# Altium PCB PowerBoardv2.PcbDoc (part 1 of 2)
Units mil, origin at the board's own origin, x right, y up, seen from the top; angles counter-clockwise.
Board outline 3917.32 x 2917.32 mil, 2 copper layers (Top Layer, Bottom Layer), stack 64.512 mil thick; 84 components, 73 nets, 331 pads, 371 vias.
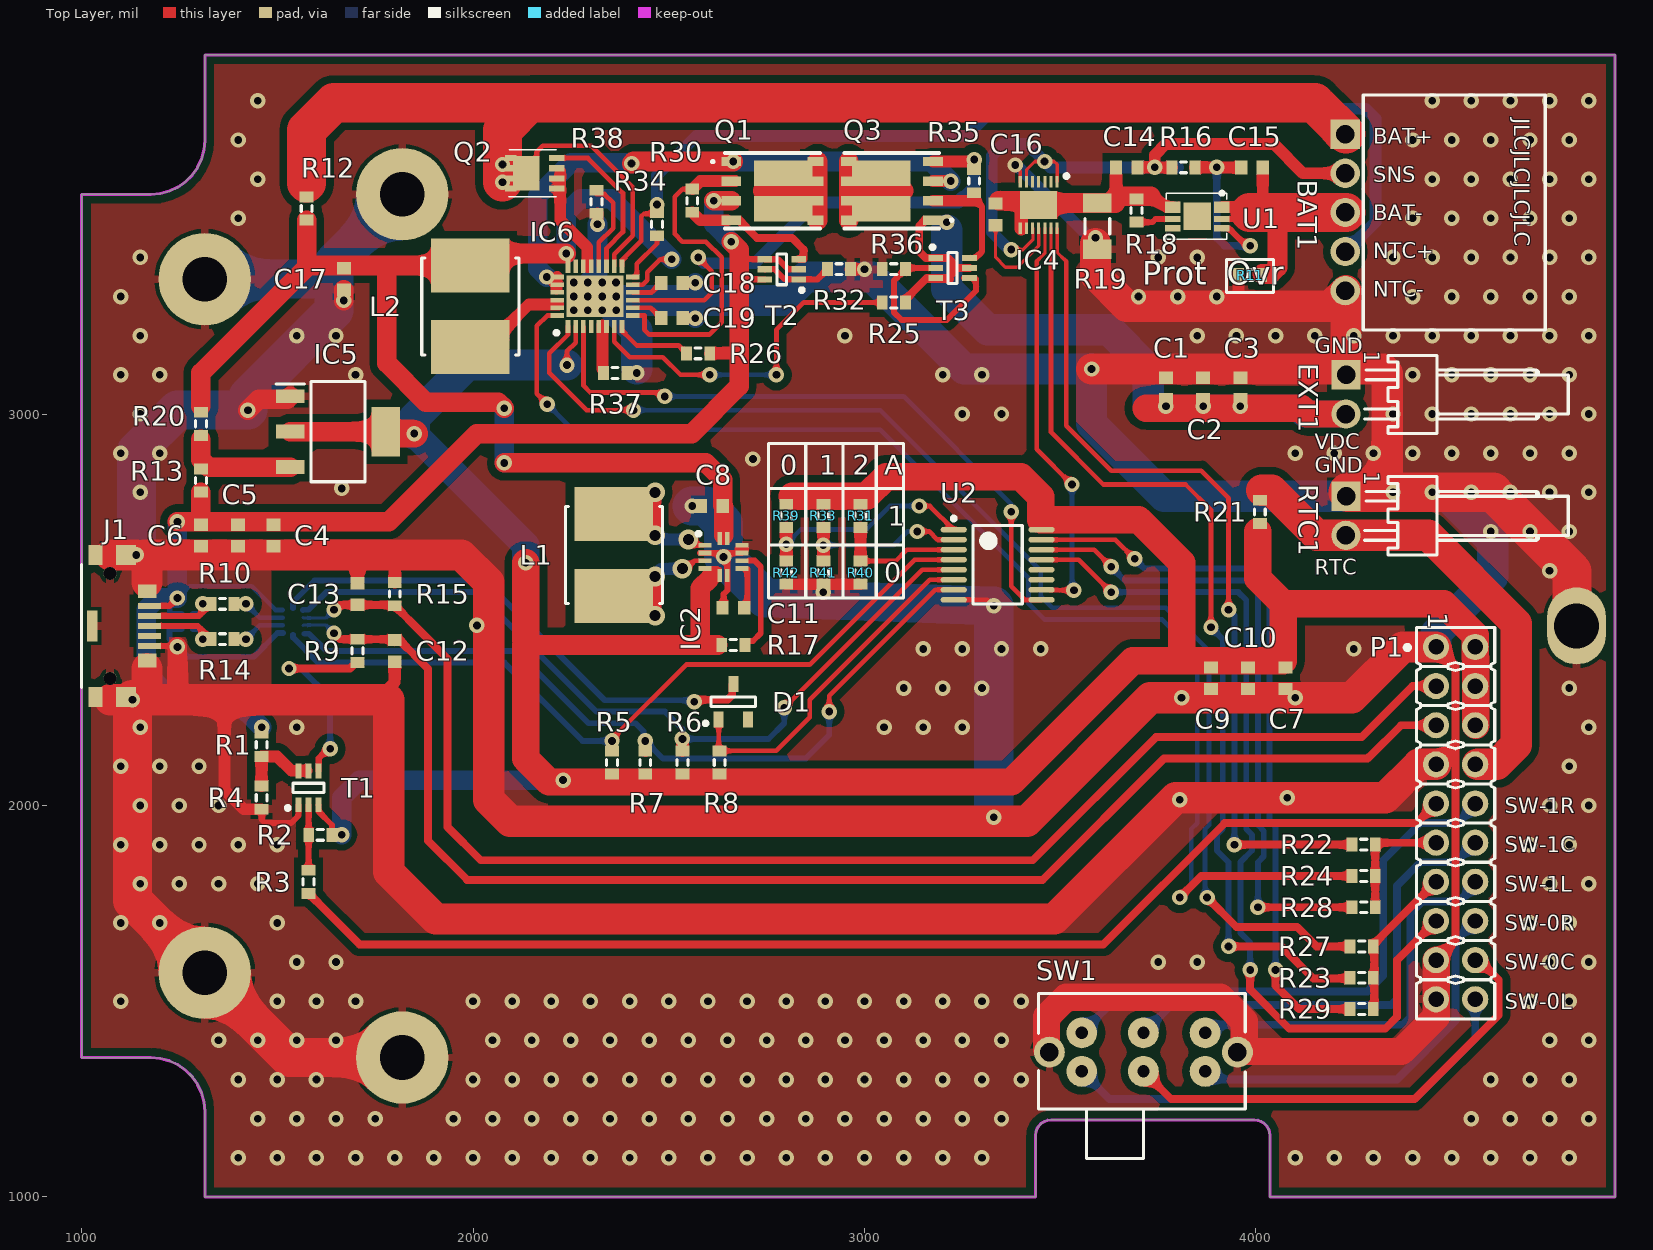
[diagram p0: Top Layer view]
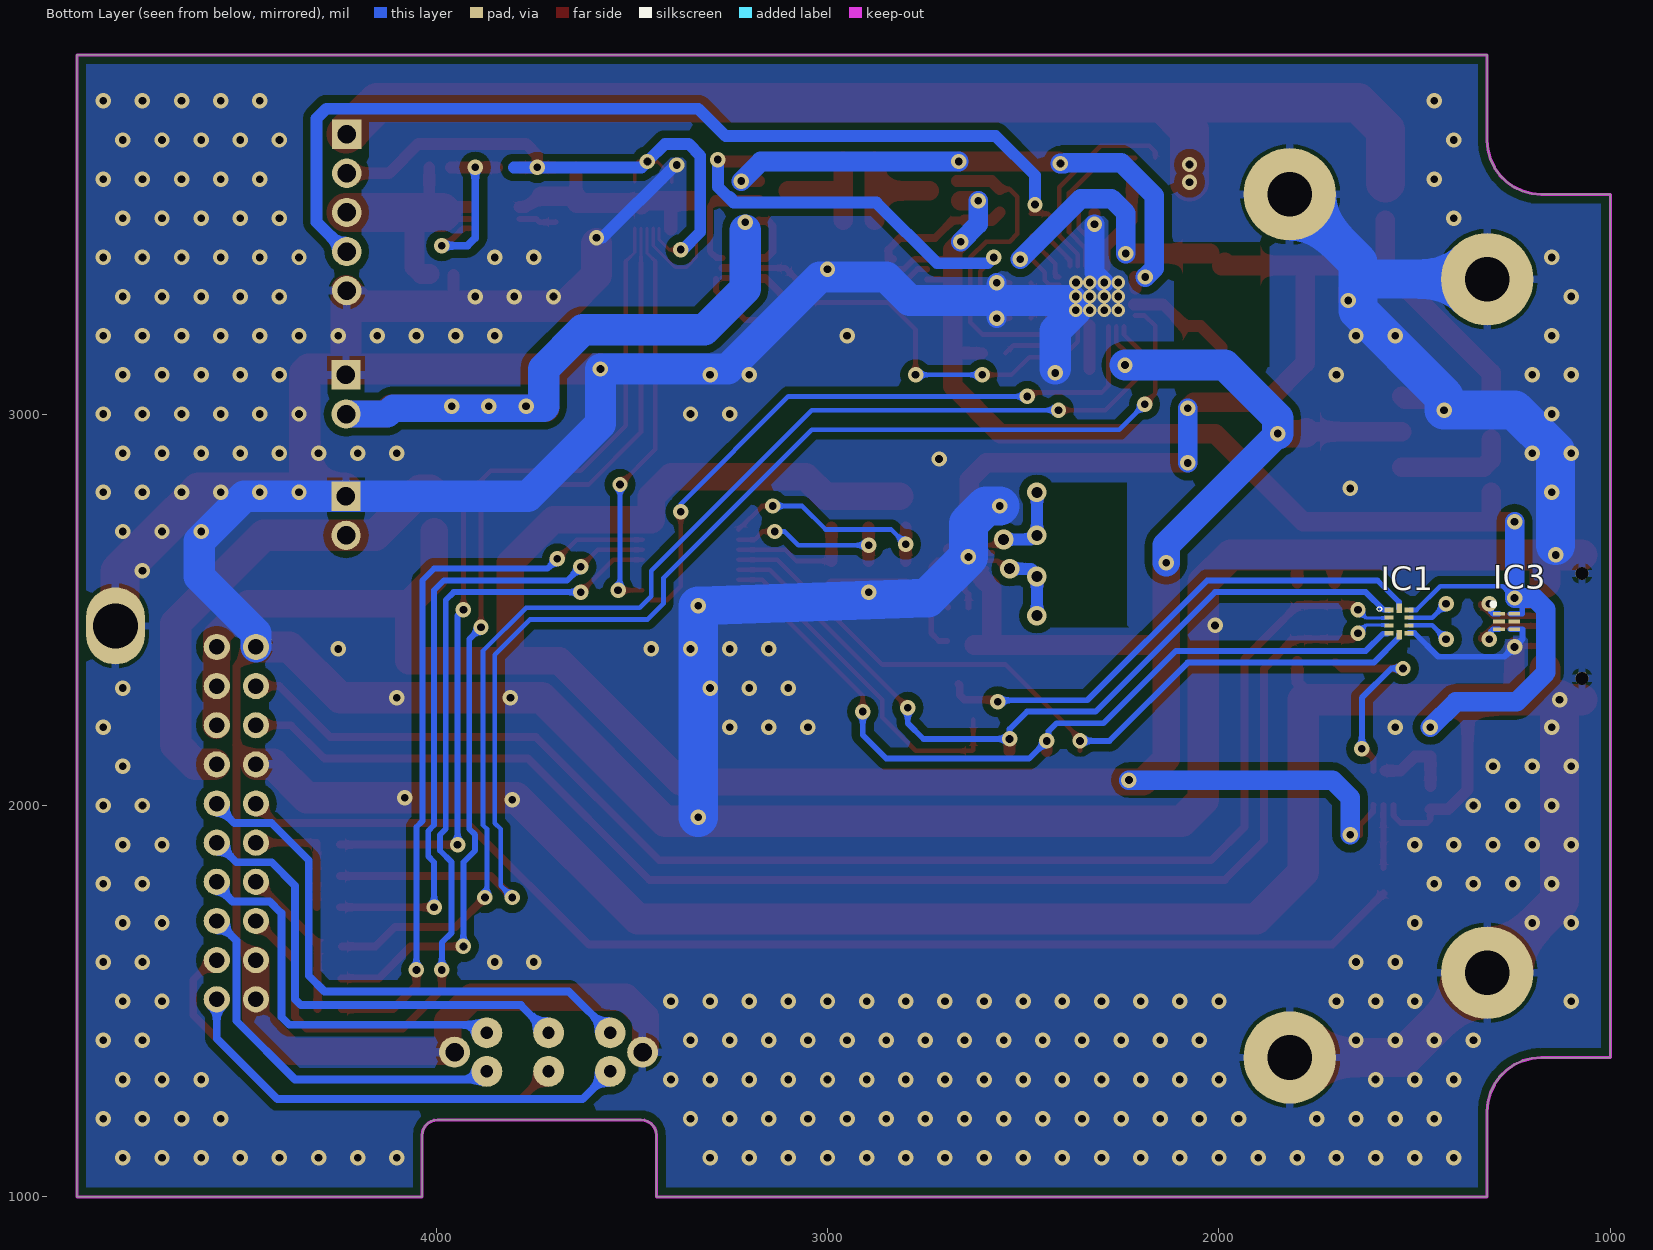
[diagram p1: Bottom Layer view, seen from below]

## Layer stack, top to bottom
Top Solder: solder mask 1, SM-001, Dk 4
Top Layer: signal copper 2.7559
Dielectric 1: core 59, Core-043, Dk 4.3
Bottom Layer: signal copper 2.7559
Bottom Solder: solder mask 1, SM-001, Dk 4

## Board outline
3437.01,1000 3437.01,1157.48 3437.99,1166.24 3440.91,1174.56 3445.6,1182.03 3451.83,1188.26 3459.3,1192.95 3467.62,1195.86 3476.38,1196.85 3996.06,1196.85 4004.82,1195.86 4013.14,1192.95 4020.61,1188.26 4026.84,1182.03 4031.53,1174.56 4034.45,1166.24 4035.43,1157.48 4035.43,1000 4917.32,1000 4917.32,3917.32 1314.96,3917.32 1314.96,3698.82 1312.87,3674.89 1306.65,3651.69 1296.5,3629.92 1282.72,3610.25 1265.74,3593.26 1246.06,3579.48 1224.29,3569.33 1201.09,3563.12 1177.16,3561.02 1000,3561.02 1000,1356.3 1177.16,1356.3 1201.09,1354.21 1224.29,1347.99 1246.06,1337.84 1265.74,1324.06 1282.72,1307.08 1296.5,1287.4 1306.65,1265.63 1312.87,1242.43 1314.96,1218.5 1314.96,1000

## Design rules (kind name [scope] priority, off if disabled: settings)
BoardOutlineClearance [All] p1: gap=7.87 ignorepadtopadclearanceinfootprint=FALSE except(15.75: Arc-SplitBarrior Arc-SplitContinuation Track-SplitBarrior Track-SplitContinuation SMDPad-SplitBarrior SMDPad-SplitContinuation THPad-SplitBarrior THPad-SplitContinuation Via-SplitBarrior Via-SplitContinuation Fill-SplitBarrior Fill-SplitContinuation Poly-SplitBarrior Poly-SplitContinuation Region-SplitBarrior Region-SplitContinuation Text-SplitBarrior Text-SplitContinuation)
Clearance "GND Flood" [InNamedPolygon('GND_FLOOD_TOP') or InNamedPolygon('GND_FLOOD_BOTTOM')] p1: gap=20 ignorepadtopadclearanceinfootprint=FALSE
Clearance "Clearance Bottom Layer" [OnLayer('Bottom Layer')] p2: gap=6 ignorepadtopadclearanceinfootprint=TRUE except(10: Arc-Text Track-Text SMDPad-Text THPad-Text Via-Text Fill-Text Poly-Text Region-Text Text-Text)
Clearance "Clearance Top Layer" [OnLayer('Top Layer')] p3: gap=6 ignorepadtopadclearanceinfootprint=TRUE except(10: Arc-Text Track-Text SMDPad-Text THPad-Text Via-Text Fill-Text Poly-Text Region-Text Text-Text)
Clearance [All] p4: gap=7.87 ignorepadtopadclearanceinfootprint=FALSE except(3.5: Arc-Arc Arc-Track Arc-SMDPad Track-Track Track-SMDPad SMDPad-SMDPad; 5: Arc-Via Track-Via SMDPad-Via THPad-Via Via-Via; 10: Arc-Text Track-Text SMDPad-Text THPad-Text Via-Text Fill-Text Poly-Text Region-Text Text-Text)
DiffPairsRouting [All] p1: maxlimit=100 minlimit=10 mostfreqgap=30 toplayer_minwidth=8 toplayer_maxwidth=100 toplayer_prefwidth=15 bottomlayer_minwidth=8 bottomlayer_maxwidth=100 bottomlayer_prefwidth=15 maxuncoupledlength=500
HoleSize [All] p1: absolutevalues=TRUE maxlimit=248.03 minlimit=7.87 maxpercent=80.000 minpercent=20.000
MinimumAnnularRing [All] p1: minimumring=3
MinimumSolderMaskSliver [All] p1: minsoldermaskwidth=3.94
PolygonConnect PolygonConnect_1 [All] p1: thpad.connectstyle=Relief thpad.reliefconductorwidth=20 thpad.reliefentries=4 thpad.polygonreliefangle="90 Angle" thpad.airgapwidth=10 smdpad.connectstyle=Relief smdpad.reliefconductorwidth=20 smdpad.reliefentries=4 smdpad.polygonreliefangle="90 Angle" smdpad.airgapwidth=10 via.connectstyle=Direct via.reliefconductorwidth=20 via.reliefentries=4 via.polygonreliefangle="90 Angle" via.airgapwidth=10
RoomDefinition "[004] Charger" [InComponentClass('[004] Charger')] p1: confinementstyle=ConfineIn formatcopy=TRUE lockcomponents=FALSE outline 1636.38,3285.79 1636.38,3404.21 1838.32,3404.21 1838.32,3464.13 2030.4,3464.13 2030.4,3726.38 2285.05,3726.38 2285.05,3681.38 3239.29,3681.38 3239.29,3654.21 3313.62,3654.21 3313.62,2384.21 4108.62,2384.21 4108.62,2265.79 3851.38,2265.79 3851.38,2376.38 2605.79,2376.38 2605.79,2450.87 2205.32,2450.87 2205.32,3085.87 1838.32,3085.87 1838.32,3285.79
RoomDefinition "[003] Connectors" [InComponentClass('[003] Connectors')] p2: confinementstyle=ConfineIn formatcopy=TRUE lockcomponents=FALSE outline 2766.38,2535.79 2766.38,2799.21 4176.6,2799.21 4176.6,3829 4753,3829 4753,3202 4811.65,3202 4811.65,2582 4623.94,2582 4623.94,1441.06 4006.13,1441.06 4006.13,1084.42 3419.07,1084.42 3419.07,2493.78 3173.5,2493.78 3173.5,2535.79
RoomDefinition "[002] Battery" [InComponentClass('[002] Battery')] p3: confinementstyle=ConfineIn formatcopy=TRUE lockcomponents=FALSE outline 3301.38,3450.79 3301.38,3569.21 3363.15,3569.21 3363.15,3628.7 3610.79,3628.7 3610.79,3663.62 3874.21,3663.62 4049.21,3663.62 4049.21,3596.38 3944.65,3596.38 3944.65,3416.26 3653.23,3416.26 3653.23,3374.53 3536.77,3374.53 3536.77,3439.41 3363.15,3439.41 3363.15,3450.79
RoomDefinition "[001] USB" [InComponentClass('[001] USB')] p4: confinementstyle=ConfineIn formatcopy=TRUE lockcomponents=FALSE outline 905.36,2237.97 905.36,2679.35 1216.76,2679.35 1216.76,2599.21 1738.62,2599.21 1833.62,2599.21 1833.62,2352.76 2744.88,2352.76 2744.88,2177.24 2663.62,2177.24 2663.62,2050.79 1669.21,2050.79 1669.21,1891.38 1613.62,1891.38 1613.62,1745.79 1546.38,1745.79 1546.38,1960.79 1426.38,1960.79 1426.38,2237.97
RoomDefinition "[000] Block Diagram" [InComponentClass('[000] Block Diagram')] p5: confinementstyle=ConfineIn formatcopy=TRUE lockcomponents=FALSE outline 1271.38,2630.79 1271.38,2889.21 1271.38,3034.21 1475.71,3034.21 1475.71,3107.72 1541.38,3107.72 1541.38,3584.21 1608.62,3584.21 1608.62,3388.62 4044.21,3388.62 4044.21,3321.38 4043.62,3321.38 4043.62,2690.79 1523.62,2690.79 1523.62,2630.79
RoutingCorners [All] p1: cornerstyle=Round minsetback=100 maxsetback=100
RoutingVias [All] p1: holewidth=19.68 width=39.37 viastyle="Through Hole" minholewidth=7.87 minwidth=17.72 maxholewidth=39.37 maxwidth=78.74
SilkToSilkClearance [All] p1: silktosilkclearance=3.94
SilkToSolderMaskClearance [IsPad] p1: minsilkscreentomaskgap=3.94 clearancetoexposedcopper=TRUE
SolderMaskExpansion [All] p1: expansion=4
UnRoutedNet [All] p1: checkbadconnections=TRUE
Width [All] p1: maxlimit=100 minlimit=3.5 preferedwidth=15
23 further rules are at their usual default settings.

## Classes and differential pairs
component class "[004] Charger": C4 C8 C9 C15 C18 C19 IC2 IC6 L2 Q2 Q3 R12 R13 R16 R19 R25 R26 R30 R36 R37 R40 T2 T3
component class "[003] Connectors": BAT1 EXT1 P1 R12 R23 R25 R27 R37 R40 R41 R42 RTC1 SW1 U2
component class "[002] Battery": C4 C6 C11 IC4 R16 R25 R26 U2
component class "[001] USB": C2 C6 D1 IC1 IC6 J1 R3 R5 R9 R10 R11 R15 R36 T1
component class "[000] Block Diagram": C1 C2 C6 C16 IC1 R9 R15 R35 R36
differential pair USB_R: +USB_R_P -USB_R_N
differential pair USB_DEV: +USB_DEV_P -USB_DEV_N

## Components (designator, comment, footprint, x,y, rotation, side; value= is the part's Value field where it differs from the comment)
BAT1 "Header 5H" MOLEX-705530004 4514,3515 r270 top
C1 "Cap Semi" 1608[0603] 3770,3065 r270 top value=10uF
C2 "Cap Semi" 1608[0603] 3865,3065 r270 top value=1uF
C3 "Cap Semi" 1608[0603] 3960,3065 r270 top value=100nF
C4 "Cap Semi" 1608[0603] 1490,2690 r90 top value=10uF
C5 "Cap Semi" 1608[0603] 1400,2690 r90 top value=1uF
C6 "Cap Semi" 1608[0603] 1305,2690 r90 top value=100nF
C7 "Cap Semi" 1608[0603] 4075,2325 r90 top value=10uF
C8 "Cap Semi" 1608[0603] 2610,2765 r0 top value=10uF
C9 "Cap Semi" 1608[0603] 3885,2325 r90 top value=10uF
C10 "Cap Semi" 1608[0603] 3980,2325 r90 top value=10uF
C11 "Cap Semi" 1608[0603] 2665,2505 r0 top value=1nF
C12 "Cap Semi" 1608[0603] 1800,2395 r270 top value=47pF
C13 "Cap Semi" 1608[0603] 1705,2540 r90 top value=47pF
C14 "Cap Semi" 1608[0603] 3670,3630 r0 top value=100nF
C15 "Cap Semi" 1608[0603] 3990,3630 r180 top value=100nF
C16 "Cap Semi" 1608[0603] 3335,3510 r270 top value=470nF
C17 "Cap Semi" 1608[0603] 1670,3345 r90 top value=22uF
C18 "Cap Semi" 1608[0603] 2508,3335 r180 top value=47nF
C19 "Cap Semi" 1608[0603] 2508,3245 r180 top value=100nF
D1 "BAT54" SOT95P240X130-3N 2665,2265 r90 top
EXT1 "Header 2" MOLEX-705530001 4229.9,3050 r270 top
IC1 "BQ24392RSER" RSE(R-PUQFN-N10) 1540,2470 r270 bottom
IC2 "TPS63051RMWR" QFN50P250X250X100-12N-D 2640,2635 r0 top
IC3 "TPD4S012DRYR" SON50P100X145X60-6N 1265,2470 r180 bottom
IC4 "MAX17260SETD+" SON40P300X300X80-15N 3445,3534.06 r270 top
IC5 "AZ1117IH-3.3TRG1" SOT230P700X170-4N 1655,2955 r0 top
IC6 "LTC4155EUFD#PBF" QFN50P400X500X80-29N-D 2311.54,3300.79 r90 top
J1 "microUSB" "UB-MC5BR3-SDWP604-4S - custom" 1000,2458.66 r270 top
L1 "12mOhm" INDP2523X23N 2360,2640 r270 top value=1.5uH
L2 "10mOhm" INDP2523X23N 1993,3275 r90 top value=1.0uH
P1 "Header 10X2" SAMTEC_TSW-110-07-L-D-LL 4510,1955 r270 top
Q1 "SI7938DP-T1-GE3" POWERPAK-SO8_1 2765.06,3570 r0 top
Q2 "SI7615ADN-T1-GE3" "PowerPAK1212-8 Single" 2153,3615 r180 top
Q3 "SI7938DP-T1-GE3" POWERPAK-SO8_1 3069.88,3570 r180 top
R1 "Res3" J1-0603 1460,2155 r270 top value=10k
R2 "Res3" J1-0603 1610,1925 r0 top value=47k
R3 "Res3" J1-0603 1580,1805 r270 top value=1k
R4 "Res3" J1-0603 1460,2020 r270 top value=36k
R5 "Res3" J1-0603 2355,2110 r270 top value=10k
R6 "Res3" J1-0603 2535,2110 r270 top value=10k
R7 "Res3" J1-0603 2440,2110 r270 top value=10k
R8 "Res3" J1-0603 2630,2110 r270 top value=100k
R9 "Res3" J1-0603 1705,2395 r270 top value=1k5
R10 "Res3" J1-0603 1360,2515 r0 top value=2R2
R11 "Res3" J1-0603 3985,3355 r180 top value=0R
R12 "Res3" J1-0603 1575,3525 r270 top value=0R
R13 "Res3" J1-0603 1305,2830 r90 top value=0R
R14 "Res3" J1-0603 1360,2425 r0 top value=2R2
R15 "Res3" J1-0603 1800,2540 r270 top value=N/A
R16 "Res3" J1-0603 3815,3630 r0 top value=330
R17 "Res3" J1-0603 2665,2410 r180 top value=100k
R18 "Res3" J1-0603 3695,3520 r90 top value=2k7
R19 "Res3" RESC3216X80N 3595,3480 r90 top value=10m
R20 "Res3" J1-0603 1305,2975 r270 top value=0R
R21 "Res3" J1-0603 4010,2750 r270 top value=0R
R22 "Res3" J1-0603 4275,1900 r180 top value=0R
R23 "Res3" J1-0603 4270,1560 r0 top value=0R
R24 "Res3" J1-0603 4275,1820 r180 top value=0R
R25 "Res3" J1-0603 3075,3285 r180 top value=3k6
R26 "Res3" J1-0603 2575,3155 r180 top value=3k6
R27 "Res3" J1-0603 4270,1640 r0 top value=0R
R28 "Res3" J1-0603 4275,1740 r180 top value=0R
R29 "Res3" J1-0603 4270,1480 r0 top value=0R
R30 "Res3" J1-0603 2560,3545 r270 top value=5M
R31 "Res3" J1-0603 2990,2740 r90 top value=0R
R32 "Res3" J1-0603 2935,3370 r0 top value=47k
R33 "Res3" J1-0603 2895,2740 r90 top value=0R
R34 "Res3" J1-0603 2470,3485 r90 top value=100k
R35 "Res3" J1-0603 3280,3595 r270 top value=5M
R36 "Res3" J1-0603 3075,3370 r180 top value=47k
R37 "Res3" J1-0603 2363,3105 r180 top value=1k21
R38 "Res3" J1-0603 2315.26,3542.26 r90 top value=499
R39 "Res3" J1-0603 2800,2740 r90 top value=0R
R40 "Res3" J1-0603 2990,2595 r90 top value=0R
R41 "Res3" J1-0603 2895,2595 r90 top value=0R
R42 "Res3" J1-0603 2800,2595 r90 top value=0R
RTC1 "Header 2" MOLEX-705530001 4229.9,2740 r270 top
SW1 "Switch" EG2215 3712.6,1370.08 r0 top
T1 "BC847BS" SOT65P210X110-6N 1580,2045 r90 top
T2 "BC847BS" SOT65P210X110-6N 2788.72,3369.63 r180 top
T3 "BC847BS" SOT65P210X110-6N 3225,3373.06 r0 top
U1 "AP9211S-AK-HAC7" U-DFN2030-6 3850,3505 r270 top
U2 "TCA9554PWR" PW16_N 3340,2615 r0 top

## Footprints (in the part's own frame and the unit in brackets; to place one, negate y for a bottom-side part, rotate by r counter-clockwise, add the part's x,y. Pads: shape width x height; smd on the part's side, far side on the other; paste and mask are expansions set on the pad)
1608[0603] [mm] "Chip Capacitor, Body 1.6x0.8mm, IPC High Density"
  rect 0.8x0.9 smd: 1(-0.7,0) 2(0.7,0)
  body extent -0.87,-0.48 0.87,0.48, height 1.3
EG2215 [mm]
  round 2 hole 1.2: 0(-6.1,0) 0(6.1,0)
  round 2 hole 0.8: 1(-4,1.25) 2(0,1.25) 3(4,1.25) 4(-4,-1.25) 5(0,-1.25) 6(4,-1.25)
  silkscreen extent -6.8,-6.9 6.6,3.8, body extent -6.4,-6.9 6.2,3.4, height 4.75
INDP2523X23N [mm] "BOURNS SRN6045TA Inductor"
  rect 3.5x5.1 smd: 1(-2.65,0) 2(2.65,0)
  silkscreen extent -3.15,-3.15 3.15,3.15, body extent -3.1,-3 3.1,3, height 4.6
J1-0603 [mm] "Chip Resistor, Body 1.6x0.8mm, IPC High Density"
  rect 0.7x0.9 smd: 1(-0.75,0) 2(0.75,0)
  silkscreen extent -0.2,-0.35 0.2,0.35, body extent -0.85,-0.48 0.85,0.48, height 0.9
MOLEX-705530001 [mm] "2.54mm (.100\") Pitch KK® Wire-To-Board Header, Right Angle, With Friction Lock, 2 Circuits"
  rect 1.9x1.9 hole 1.2: 1(-1.27,0.002)
  round 1.9 hole 1.2: 2(1.27,-0.002)
  silkscreen extent -2.54,1.21 2.54,14.42, body extent -3.61,-0.85 3.76,12.74, height 7.06
MOLEX-705530004 [mm]
  rect 1.9x1.9 hole 1.2: 1(-5.08,-7.264)
  round 1.9 hole 1.2: 2(-2.54,-7.264) 3(0,-7.264) 4(2.54,-7.264) 5(5.08,-7.264)
  silkscreen extent -7.62,-6.1 7.62,5.72, body extent -7.62,-7.87 7.62,5.71, height 7.06
"PowerPAK1212-8 Single" [mm]
  rect 0.99x0.405 smd: 1(-1.555,0.992) 2(-1.555,0.332) 3(-1.555,-0.328) 4(-1.555,-0.988)
  rect 0.76x0.405 smd: 5(1.43,-0.988) 6(1.43,-0.328) 7(1.43,0.332) 8(1.43,0.992)
  rect 1.725x2.235 smd: 9(0.438,0.002)
  Top Layer region: -0.432,1.118
  silkscreen extent -1.53,-1.53 1.56,1.53, body extent -2.01,-1.55 1.77,1.55, height 1.22
POWERPAK-SO8_1 [mm]
  rect 1.27x0.61 smd: 1(-2.67,1.905) 2(-2.67,0.635) 3(-2.67,-0.635) 4(-2.67,-1.905)
  rect 1.02x0.61 smd: 5(2.795,-1.905) 6(2.795,-0.635) 7(2.795,0.635) 8(2.795,1.905)
  rect 3.81x1.65 smd: 9(0.69,-1.155) 10(0.69,1.155)
  silkscreen extent -3.92,-2.45 3.08,2.45, body extent -3.24,-2.45 3.24,2.45, height 1.22
PW16_N [mm] "TSOP, 16-Leads, Body 5x4.4mm, Pitch 0.65mm, IPC Medium Density"
  oval 1.7x0.35 smd: 1(-2.85,2.275) 2(-2.85,1.625) 3(-2.85,0.975) 4(-2.85,0.325) 5(-2.85,-0.325) 6(-2.85,-0.975) 7(-2.85,-1.625) 8(-2.85,-2.275) 9(2.85,-2.275) 10(2.85,-1.625) 11(2.85,-0.975) 12(2.85,-0.325) 13(2.85,0.325) 14(2.85,0.975) 15(2.85,1.625) 16(2.85,2.275)
  silkscreen extent -2.97,-2.55 1.6,3.12, body extent -2.25,-2.55 2.25,2.55, height 1.2
QFN50P250X250X100-12N-D [mm]
  rect 0.85x0.3 smd: 1(-1.2,0.75) 2(-1.2,0.25) 3(-1.2,-0.25) 4(-1.2,-0.75) 7(1.2,-0.75) 8(1.2,-0.25) 9(1.2,0.25) 10(1.2,0.75)
  rect 0.3x0.85 smd: 5(-0.25,-1.2) 6(0.25,-1.2) 11(0.25,1.2) 12(-0.25,1.2)
  silkscreen extent -1.75,1.38 -1.5,1.62, body extent -1.3,-1.3 1.3,1.3, height 1
QFN50P400X500X80-29N-D [mm]
  rect 0.85x0.3 smd mask+0.05: 1(-1.95,1.75) 2(-1.95,1.25) 3(-1.95,0.75) 4(-1.95,0.25) 5(-1.95,-0.25) 6(-1.95,-0.75) 7(-1.95,-1.25) 8(-1.95,-1.75) 15(1.95,-1.75) 16(1.95,-1.25) 17(1.95,-0.75) 18(1.95,-0.25) 19(1.95,0.25) 20(1.95,0.75) 21(1.95,1.25) 22(1.95,1.75)
  rect 0.3x0.85 smd mask+0.05: 9(-1.25,-2.45) 10(-0.75,-2.45) 11(-0.25,-2.45) 12(0.25,-2.45) 13(0.75,-2.45) 14(1.25,-2.45) 23(1.25,2.45) 24(0.75,2.45) 25(0.25,2.45) 26(-0.25,2.45) 27(-0.75,2.45) 28(-1.25,2.45)
  rect 2.7x3.7 smd mask+0.05: 29(0,0)
  silkscreen extent -2.5,2.37 -2.25,2.62, body extent -2.05,-2.55 2.05,2.55, height 0.8
RESC3216X80N [mm] "Chip Resistor, EIA 1206, Metric 3216, Body 3.2x1.6mm, IPC Medium Density"
  rect 1.25x1.85 smd: 1(-1.5,0) 2(1.5,0)
  silkscreen extent -0.5,-0.8 0.5,0.8, body extent -1.67,-0.87 1.68,0.88, height 0.8
RSE(R-PUQFN-N10) [mm]
  rect 0.3x0.58 smd: 1(-0.75,-0.655) 4(0.75,-0.655) 6(0.75,0.655) 9(-0.75,0.655)
  rect 0.25x0.58 smd: 2(-0.25,-0.655) 3(0.25,-0.655) 7(0.25,0.655) 8(-0.25,0.655)
  rect 0.63x0.35 smd: 5(0.86,0) 10(-0.86,0)
  silkscreen extent -0.95,-1.41 -0.67,-1.13
SAMTEC_TSW-110-07-L-D-LL [mm] "20 Contacts, Pitch 2.54mm - Dual Row, Through Mount Straigh Header"
  round 1.7 hole 1: 1(-11.43,-1.27) 2(-11.43,1.27) 3(-8.89,-1.27) 4(-8.89,1.27) 5(-6.35,-1.27) 6(-6.35,1.27) 7(-3.81,-1.27) 8(-3.81,1.27) 9(-1.27,-1.27) 10(-1.27,1.27) 11(1.27,-1.27) 12(1.27,1.27) 13(3.81,-1.27) 14(3.81,1.27) 15(6.35,-1.27) 16(6.35,1.27) 17(8.89,-1.27) 18(8.89,1.27) 19(11.43,-1.27) 20(11.43,1.27)
  silkscreen extent -12.7,-3.28 12.7,2.54, body extent -12.7,-2.54 12.7,2.54, height 8.38
SON40P300X300X80-15N [mm]
  rect 0.75x0.2 smd: 1(-1.5,1.2) 2(-1.5,0.8) 3(-1.5,0.4) 4(-1.5,0) 5(-1.5,-0.4) 6(-1.5,-0.8) 7(-1.5,-1.2) 8(1.5,-1.2) 9(1.5,-0.8) 10(1.5,-0.4) 11(1.5,0) 12(1.5,0.4) 13(1.5,0.8) 14(1.5,1.2)
  rect 1.8x2.4 smd: 15(0,0)
  silkscreen extent -2,1.68 -1.75,1.92, body extent -1.55,-1.5 1.55,1.5, height 0.8
SON50P100X145X60-6N [mm]
  rect 0.75x0.25 smd: 1(-0.5,0.5) 2(-0.5,0) 3(-0.5,-0.5) 4(0.5,-0.5) 5(0.5,0) 6(0.5,0.5)
  silkscreen extent -1,1 -0.75,1.25, body extent -0.55,-0.72 0.55,0.72, height 0.6
SOT65P210X110-6N [mm] "SOT363, SC70-6, SOT, 0.65mm Pitch, 6 pin, 1.25mm W X 2.00mm L X 1.10mm H, IPC Medium Density"
  rect 0.95x0.4 smd: 1(-1.1,0.65) 2(-1.1,0) 3(-1.1,-0.65) 4(1.1,-0.65) 5(1.1,0) 6(1.1,0.65)
  silkscreen extent -1.42,-1 0.3,1.47, body extent -1.2,-1.1 1.2,1.1, height 1.1
SOT95P240X130-3N [mm] "SOT23 3-Leads, Pitch 0.95mm - Body 1.3x2.9mm, IPC Medium Density"
  rect 1.05x0.65 smd: 1(-1.15,0.95) 2(-1.15,-0.95) 3(1.15,0)
  silkscreen extent -1.52,-1.45 0.3,1.92, body extent -1.25,-1.5 1.25,1.5, height 1.3
SOT230P700X170-4N [mm]
  rect 1.85x0.9 smd: 1(-3.1,2.3) 2(-3.1,0) 3(-3.1,-2.3)
  rect 1.85x3.2 smd: 4(3.1,0)
  silkscreen extent -4.03,-3.25 1.75,3.25, body extent -3.5,-3.25 3.5,3.25, height 1.7
U-DFN2030-6 [mm]
  rect 1.8x1.8 smd mask+0.05: 0(0,0)
  rect 0.75x1 smd mask+0.05: 1(-0.6,1.6) 6(-0.6,-1.6)
  rect 0.4x1 smd mask+0.05: 2(0.175,1.6) 3(0.775,1.6) 4(0.775,-1.6) 5(0.175,-1.6)
  silkscreen extent -1.6,-2 1.5,1.9, body extent -1,-1.5 2,1.5, height 1.6
"UB-MC5BR3-SDWP604-4S - custom" [mm] "JST Sealed microUSB socket"
  rect 1.3x1.3 smd: 0(-4.6,2.9) 0(4.6,2.9)
  rect 1.3x0.9 smd: 0(-4.6,0.9) 0(4.6,0.9)
  round 0.85 hole 0.85 unplated mask+0: 0(-3.4,1.85) 0(3.4,1.85)
  rect 0.9x1.2 smd: 0(-2.25,4.25) 0(2.25,4.25)
  rect 2x0.7 smd: 0(0,0.7)
  rect 0.4x1.5 smd: 1(-1.3,4.4) 2(-0.65,4.4) 3(0,4.4) 4(0.65,4.4) 5(1.3,4.4)
  silkscreen extent -4,0 4,0, body extent -4.97,-2.15 4.97,4.55, height 3.58

## Part data
BAT1: "Header, 5-Pin, Right Angle", LatestRevisionDate=17-Jul-2002, LatestRevisionNote="Re-released for DXP Platform.", Publisher="Altium Limited"
C1 C2 C3 C4 C5 C6 C7 C8 C9 C10 C11 C12 C13 C14 C15 C16 C17 C18 C19: "Capacitor (Semiconductor SIM Model)", LatestRevisionDate=29-May-2009, LatestRevisionNote="IPC-7351 Footprint Added.", PackageDescription="Chip Capacitor", PackageReference=C1206, Published=8-Jun-2000, Publisher="Altium Limited"
D1: "Diode Schottky  Anode Pin 1 Cathode Pin 3 (Pas de pin 2)", Case=SOT23-3, Manufacturer="FAIRCHILD SEMICONDUCTOR", Power=200mA, Voltage=30V, Author="CERN DEM JLC", Bonding=No, ComponentHeight=1.30mm, Component Type=Standard, CreateDate=17.09.2009, Device=BAT54, HelpURL=\\cern.ch\dfs\Applications\Altium\Datasheets\BAT54.pdf, LatestRevisionDate=27.05.2010, Manufacturer Part Number=BAT54, Mounted=Yes, PackageDescription="SOT23 3-Leads, Pitch 0.95mm - Body 1.3x2.9mm, IPC Medium Density", Part Description="Single Small Signal Schottky Diode", Part Number=BAT54, Pin Count=3, PressFit=No, Sense=No, SMD=Yes, Socket=No
EXT1 RTC1: "Header, 2-Pin", LatestRevisionDate=17-Jul-2002, LatestRevisionNote="Re-released for DXP Platform.", Publisher="Altium Limited"
IC1: "Integrated Circuit", Manufacturer_Name="Texas Instruments", Mouser Part Number=595-BQ24392RSER, RS Part Number=8279327, Datasheet Link=http://www.ti.com/lit/gpn/bq24392, Manufacturer_Part_Number=BQ24392RSER, Mouser Price/Stock=https://www.mouser.com/Search/Refine.aspx?Keyword=595-BQ24392RSER, RS Price/Stock=http://uk.rs-online.com/web/p/products/8279327
IC2: "Integrated Circuit", Manufacturer_Name="Texas Instruments", ComponentLink1Description="TPS6305x Datasheet", ComponentLink1URL=http://www.ti.com/lit/ds/symlink/tps63051.pdf, Datasheet Link=http://www.ti.com/lit/gpn/tps63051, Height=1mm, Manufacturer_Part_Number=TPS63051RMWR
IC3: "Integrated Circuit", Manufacturer_Name="Texas Instruments", Mouser2 Part Number=595-TPD4S012DRYR, Datasheet Link=http://www.ti.com/lit/ds/symlink/tpd4s012.pdf, Height=0.6mm, Manufacturer_Part_Number=TPD4S012DRYR, Mouser2 Price/Stock=https://www.mouser.com/Search/Refine.aspx?Keyword=595-TPD4S012DRYR
IC4: "Integrated Circuit", Manufacturer_Name="Maxim Integrated", Mouser2 Part Number=700-MAX17260SETD+, ComponentLink1Description="MAX17260 Datasheet", ComponentLink1URL=https://datasheets.maximintegrated.com/en/ds/MAX17260.pdf, ComponentLink2Description="MAX17260SETD+ (Mouser)", ComponentLink2URL=https://pl.mouser.com/ProductDetail/Maxim-Integrated/MAX17260SETD%2b?qs=sGAEpiMZZMve4%2FbfQkoj%252BAnnYqGcWj2a8PZHpMVmFSA%3D, ComponentLink3Description="MAX17260 User Guide", ComponentLink3URL=https://pdfserv.maximintegrated.com/en/an/MAX1726x-ModelGauge-m5-EZ-user-guide.pdf, Datasheet Link=https://componentsearchengine.com/Datasheets/1/MAX17260SETD+.pdf, Height=0.8mm, Manufacturer_Part_Number=MAX17260SETD+, Mouser2 Price/Stock=https://www.mouser.com/Search/Refine.aspx?Keyword=700-MAX17260SETD%2B
IC5: "Integrated Circuit", Manufacturer_Name="Diodes Inc.", Mouser2 Part Number=621-AZ1117IH-3.3TRG1, Datasheet Link=https://componentsearchengine.com/Datasheets/1/AZ1117IH-3.3TRG1.pdf, Height=1.7mm, Manufacturer_Part_Number=AZ1117IH-3.3TRG1, Mouser2 Price/Stock=https://www.mouser.com/Search/Refine.aspx?Keyword=621-AZ1117IH-3.3TRG1
IC6: "Integrated Circuit", Manufacturer_Name="Linear Technology", Datasheet Link=http://www.analog.com/media/en/technical-documentation/data-sheets/4155fd.pdf, Height=0.8mm, Manufacturer_Part_Number=LTC4155EUFD#PBF
J1: "microUSB connector"
L1: library part Inductor, "Inductor SRN6045TA-1R5Y", Code_IEC=1005, Code_JEITA=0402, ComponentLink1Description="SRN6045TA-1R5Y (Mouser)", ComponentLink1URL=https://pl.mouser.com/ProductDetail/Bourns/SRN6045TA-1R5Y?qs=sGAEpiMZZMsg%252By3WlYCkU3tyM9HcjVri8VL%2FIY%252BgGEQ%3D, LatestRevisionDate=29-May-2009, LatestRevisionNote="IPC-7351 Footprint Added.", PackageDescription="Chip Inductor", PackageReference=0402-A, Published=8-Jun-2000, Publisher="Altium Limited"
L2: library part Inductor, "Inductor SRN6045TA-1R0Y", Code_IEC=1005, Code_JEITA=0402, ComponentLink2Description="SRN6045-1R0Y (Mouser)", ComponentLink2URL=pl.mouser.com/ProductDetail/Bourns/SRN6045-1R0Y?qs=sGAEpiMZZMsg%252By3WlYCkU0o4wAoqWTm0KET%2FFU%252BpntA%3D, LatestRevisionDate=29-May-2009, LatestRevisionNote="IPC-7351 Footprint Added.", PackageDescription="Chip Inductor", PackageReference=0402-A, Published=8-Jun-2000, Publisher="Altium Limited"
P1: "Header, 10-Pin, Dual row", LatestRevisionDate=17-Jul-2002, LatestRevisionNote="Re-released for DXP Platform.", Publisher="Altium Limited"
Q1 Q3: "MOSFET (N-Channel)", Manufacturer_Name=Vishay, Datasheet Link=https://www.vishay.com/docs/65365/si7938dp.pdf, Manufacturer_Part_Number=SI7938DP-T1-GE3
Q2: "MOSFET (P-Channel)", Manufacturer_Name=Vishay, Manufacturer_Part_Number=SIS413DN-T1-GE3, ComponentLink1Description=Mouser, ComponentLink1URL=https://pl.mouser.com/ProductDetail/Vishay-Siliconix/SI7615ADN-T1-GE3?qs=sGAEpiMZZMshyDBzk1%2FWi6E1PdrpaYNpUmwK%2FZj1bgw%3D, ComponentLink2Description=Datasheet, ComponentLink2URL=https://pl.mouser.com/datasheet/2/427/si7615cdn-1018932.pdf
R1 R2 R3 R4 R5 R6 R7 R8 R9 R10 R11 R12 R13 R14 R15 R16 R17 R18 R19 R20 R21 R22 R23 R24 R25 R26 R27 R28 R29 R30 R31 R32 R33 R34 R35 R36 R37 R38 R39 R40 R41 R42: "Resistor", LatestRevisionDate=29-May-2009, LatestRevisionNote="IPC-7351 Footprint Added.", PackageDescription="Chip Resistor", PackageReference=J1-0603, Published=8-Jun-2000, Publisher="Altium Limited"
SW1: library part SW_TYCO_1825010-5, "DPDTSwitch", Manufacturer=TYCO, Manufacturer Part Number="1825010-5 or ASE22GL04", Author="CERN DEM JLC", ComponentHeight=8.14mm, Component Type=Standard, CreateDate=26.02.2015, Family=Switch, HelpURL=\\cern.ch\dfs\Applications\Altium\Datasheets\SW_TYCO_1825010-5.pdf, LatestRevisionDate=26.02.2015, Mounted=Yes, PackageDescription="Pitch 2.54mm,  Body 10.16x7.36mm, DPDT  SMD Slide DIP Switch, Extented Top Actuator, TYCO ASE/F Series", Part Description="Surface Mount DPDT Slide DIP Switch, Extented Top Actuator, Contact Rating 300mA @ 115VDC", Part Number=SW_TYCO_1825010-5, Pin Count=6, PressFit=No, Sense=No, SMD=Yes, Socket=No, Status=None
T1 T2 T3: "45V 100mA Dual NPN General-Purpose Transistor", Case=SOT363, Manufacturer="NXP SEMICONDUCTORS", Author="CERN DEM JMW", Bonding=No, ComponentHeight=1.1mm, Component Type=Standard, CreateDate=10.07.2015, Device=BC847BS, HelpURL=\\cern.ch\dfs\Applications\Altium\Datasheets\BC847BS.pdf, LatestRevisionDate=10.07.2015, Manufacturer Part Number=BC847BS, Mounted=Yes, PackageDescription="SOT363, SC-88, SOT, 0.65mm Pitch, 6 pin, 1.25mm W X 2.00mm L X 1.10mm H, IPC Medium Density", Part Description="45V 100mA Dual NPN General-Purpose Transistor", Part Number=BC847BS, Pin Count=6, PressFit=No, Sense=No, SMD=Yes, Socket=No
U1: library part AP9211, "SINGLE CHIP SOLUTION FOR 1-CELL Li+ BATTERY PACK", ComponentLink1Description="AP9211S-AK-HAC-7 (Mouser)", ComponentLink1URL=https://pl.mouser.com/ProductDetail/Diodes-Incorporated/AP9211S-AK-HAC-7?qs=%2Fha2pyFaduhU8ORG8s%252BdQ8ce%2FFXbiZtTJujjlGEM9Y4G1qKWx8axSg%3D%3D, ComponentLink2Description="AP9211 Datasheet", ComponentLink2URL=https://www.diodes.com/assets/Datasheets/AP9211.pdf
U2: "Remote 8-Bit I2C and SMBus I/O Expander, 1.65 to 5.5 V, -40 to 85 degC, 16-pin TSSOP (PW), Green (RoHS & no Sb/Br)", 5V Tolerant I/O=Yes, Manufacturer="Texas Instruments", Max Frequency(kHz)=400, Supplier Part Number 1=296-30135-2-ND, # of I/Os=8, Code_JEDEC=MO-153, ComponentLink1Description=Datasheet, ComponentLink1URL=http://www.ti.com/general/docs/lit/getliterature.tsp?genericPartNumber=TCA9554&fileType=pdf, Configuration Registers=Yes, DatasheetVersion=SCPS233, Eco-Plan="Green (RoHS & no Sb/Br)", fSCLK(Max)(MHz)=401, I2C Address=0100xxx, Interrupt Output=Yes, Low Power=Yes, Mounting Technology="Surface Mount", PackageDescription="16-Pin Plastic Thin Small Outline Package 5 x 4.4 mm Body ,0.65 mm Pitch", PackageReference=PW16, PackageVersion="revG, Feb-2011", PartNumber=TCA9554PWR, SubFamily="I2C IO Expander", Supplier 1=Digi-Key, Supplier 2=Digi-Key, Supplier 3=Digi-Key, Supplier 4=Newark, Supplier 5=Mouser, Supplier Part Number 2=296-30135-1-ND, Supplier Part Number 3=296-30135-6-ND, Supplier Part Number 4=76T8038, Supplier Part Number 5=595-TCA9554PWR, VCC(Max)(V)=5.5, VCC(Min)(V)=1.65, Vcc range(V)="1.65 to 5.5"

## Free pads (board coordinates)
  round 236.22 hole 114.17: 1(1314.96,1572.83) 1(1314.96,3344.49) 1(1818.9,1356.3) 1(1818.9,3561.02)
  oval 150x196.85 hole 114.17: 1(4818.9,2458.66)

## Via types
v1: diameter 39.37, hole 19.68, Top Layer to Bottom Layer, tented top, 353 vias
v2: diameter 35, hole 19.68, Top Layer to Bottom Layer, tented top, 12 vias
v3: diameter 50, hole 28, Top Layer to Bottom Layer, tented top, 6 vias

## Nets (pads, with @x,y where several pads share a name; then routed paths per layer and width w, separated by ;. In a path a pad name is that pad's centre, name@x,y a point inside that pad or via, vN(x,y) a via of type N, cw(c..) or ccw(c..) an arc to the next point about the centre after c; other vN are vias at no path point)
3V3: C7.2 C9.2 C10.2 IC2.4 IC2.5 IC5.2 IC5.4 IC6.2 P1.2 P1.4 P1.6 R2.2 R5.2 R6.2 R7.2 R8.2 R17.2 R21.2 R31.2 R33.2 R39.2 T1.3 U2.16 | length 8004.1
  Top Layer w12: v1(2240,3125) 2240,3160 2262.33,3182.33 IC6.2 ; IC2.4 2592.85,2605.38 2624.81,2605.38 IC2.5@2626.88,2603.31 ; IC2.5@2630,2603.31 IC2.5@2626.88,2603.31 ; IC2.5 2630.16,2600.03 IC2.5@2626.88,2603.31
  Top Layer w15: T1.3 1605.96,2001.32 1605.96,1984.04 1640,1950 1640,1925.47 R2.2 v1(1665,1925)
  Top Layer w30: 2615,2590 2615,2595 ; R31.2 2990,2790 ; 4070,2500 4085,2515 4090.47,2520.47
  Top Layer w50: IC5.2 IC5.4 ; 2135,2410 R17.2@2625.47,2410 ; 2580,2425 2580,2555 2605,2580
  Top Layer w70: IC5.4 1777.05,2951.42 1778.46,2950 v1(1850,2950) ; 2135,2410 2135,2120 2195,2060 2630,2060 3375,2060 3685,2370 3810,2370 ; 2135,2425 v1(2135,2620) ; 2815,2790 2990,2790 3005,2790 3055,2840 3398.99,2840 3450,2788.99 3450,2730 3700,2730 3810,2620 3810,2370 ; 4005,2700 4005,2580 4070,2515 ; P1.6@4561,2205 4561,2376.12 4560,2377.12 P1.2 4560,2435 4480,2515 4085,2515 4070,2515 ; 3810,2370 4070,2370 4070,2500 4070,2515
  Bottom Layer w15: P1.2@4555,2405 P1.2
  Bottom Layer w50: v1(1665,1925) 1665,2020 1710,2065 v1(2230,2065)
  Bottom Layer w70: v1(1850,2950) 2135,2665 v1(2135,2620)
  Bottom Layer w80: v1(1850,2950) 1850,2990 1985,3125 v1(2240,3125)
BAT_ALRT: IC4.12 U2.10 | length 1034.7
  Top Layer w8: 3440,3390 3460.75,3410.75 IC4.12
  Top Layer w12: 3440,3390 3440,2910 v1(3530,2820) ; U2.10@3473.23,2550 v1(3535,2550)
  Bottom Layer w12: v1(3530,2820) 3530,2555 v1(3535,2550)
BAT_GND: BAT1.3 C15.1 R11.1 U1.1 U1.2 | length 675.1
  Top Layer w15: U1.2 3948.68,3498.11
  Top Layer w30: U1.1 3971.38,3528.62 3985,3515 4017.56,3547.56 C15.1 ; 4050,3515 4055,3510
  Top Layer w50: R11.1@4015.75,3357.72 4037.43,3357.72 4055,3375.29 4055,3510
  Top Layer w100: 3985,3515 4050,3515 BAT1.3@4230,3515
BAT_NTC: BAT1.4 IC6.15 R34.2 | length 2575.8
  Top Layer w12: IC6.15 2380.44,3392.44 2430,3442 2430,3505 2436.79,3511.79 R34.2@2480.26,3511.79
  Top Layer w30: R34.2@2470,3522.06 v1(2470,3535)
  Bottom Layer w30: v1(2470,3535) 2470,3610 2570,3710 3260,3710 3330,3780 4280,3780 4305,3755 4305,3490 BAT1.4@4230,3415
BAT_SCL: IC4.14 R22.2 | length 2207.7
  Top Layer w8: IC4.14 3492.24,3412.76 3515,3390
  Top Layer w12: 3515,3390 3515,2970 3630,2855 3860,2855 3930,2785 v1(3930,2500)
  Top Layer w20: v1(3945,1900) R22.2
  Bottom Layer w15: v1(3930,2500) 3945,2485 v1(3945,1900) v1@3955,1900
BAT_SDA: IC4.13 R23.1 | length 2503.8
  Top Layer w8: 3476.5,3386.5 IC4.13
  Top Layer w12: 3476.5,3386.5 3476.5,2953.5 3610,2820 3820,2820 3885,2755 v1(3885,2455)
  Top Layer w20: v1(3930,1640) 4065,1640 4146.69,1558.31 R23.1@4241.69,1558.31
  Bottom Layer w15: v1(3885,2455) 3915,2425 3915,1940 3900,1925 3900,1885 3930,1855 v1(3930,1640)
BAT_SNS: BAT1.2 C14.2 IC4.1 IC4.6 IC4.10 R16.1 | length 1689.6
  Top Layer w8: v1(3375,3420) 3375.43,3419.57 3404.57,3419.57 3430,3445 IC4.10@3430,3475 ; IC4.6 3413.57,3593.17 3413.57,3622.61 3414.69,3623.73 3414.69,3624.69 3435,3645 v1(3460,3645) 3485,3645 3492.24,3637.76 IC4.1
  Top Layer w30: C14.2 v1(3741.52,3630) ; R16.1 v1(3741.52,3630) ; BAT1.2@4230,3615 4120,3615 4045,3690 3770,3690 3741.52,3661.52 v1(3741.52,3630)
  Bottom Layer w30: v1(3375,3420) 3370,3420 3325,3465 3325,3660 3355,3690 3415,3690 v1(3460,3645) 3475,3630 3801.52,3630
CHG_AL: IC1.4 R7.1 U2.7 | length 2074.5
  Top Layer w12: v1(2910,2240) 2910,2280 3181.02,2551.02 U2.7
  Top Layer w30: R7.1 v1(2440,2165)
  Bottom Layer w15: IC1.4@1569.7,2438.88 1581.12,2438.88 1625,2395 2110,2395 2295,2210 2415,2210 2435.34,2189.66 2435.34,2169.66 v1(2440,2165) 2485,2120 2850,2120 2910,2180 v1(2910,2240) v1@2910,2250
CHG_DET: D1.1 R8.1 U2.6 | length 886.4
  Top Layer w12: D1.1 2627.6,2141.93 R8.1 2774.53,2139.53 2860,2225 2860,2270 3166.61,2576.61 U2.6
CHG_IRQ: IC6.3 U2.9 | length 1671.3
  Top Layer w12: IC6.3 2282.02,3072.98 2300,3055 2480,3055 v1(2490,3045) ; v1(3375,2750) 3375,2560 3409.91,2525.09 3451.86,2525.09 U2.9
  Bottom Layer w12: v1(2490,3045) 3100,3045 3375,2770 v1(3375,2750)
CHG_SCL: IC6.28 R24.2 | length 3339.4
  Top Layer w12: 2162.97,3215.03 2162.97,3224.97 2189.57,3251.57 IC6.28 ; 2163,3215 2163,3052 v1(2190,3025)
  Top Layer w20: v1(3805,1765) 3860,1820 R24.2
  Bottom Layer w12: v1(2190,3025) 2255,2960 3040,2960 3418.75,2581.25 3418.75,2516.25 3460,2475 3760,2475 3850,2385 3850,1955 3835,1940 3835,1795 v1(3805,1765)
CHG_SDA: IC6.1 R27.1 | length 3211.5
  Top Layer w12: IC6.1 2242.65,3202.65 2195,3155 2195,3105 2290,3010 v1(2410,3010)
  Top Layer w20: v1(3875,1765) 3950,1690 4105,1690 4155,1640 R27.1
  Bottom Layer w12: v1(2410,3010) 3040,3010 3450,2600 3450,2535 3480,2505 3770,2505 3880,2395 3880,1950 3870,1940 3870,1775 v1@3880,1765
GND: BAT1.5 C1.1 C2.1 C3.1 C4.1 C5.1 C6.1 C7.1 C8.1 C9.1 C10.1 C11.1 C12.2 C13.2 C17.1 C18.1 C19.1 EXT1.1 IC1.6 IC2.2 IC2.6 IC2.9 IC2.10 IC3.4 IC4.7 IC5.1 IC6.29 J1.0 J1.5 P1.1 P1.7 P1.17 P1.19 pad.1 R4.2 R11.2 R15.1 R19.1 R32.2 R36.2 R37.1 R38.1 R40.1 R41.1 R42.1 RTC1.1 SW1.0 T1.1 U2.8 | length 23856.4
  Top Layer w10: v1(3385,3636.03) 3385,3632.05 3397.76,3619.3 IC4.7
  Top Layer w12: U2.8 3313.85,2525.43 3329.29,2510 v1(3330,2510)
  Top Layer w15: J1.5 1242.52,2407.48 v1(1245,2405) ; R4.2 1460.81,1989.67 1460.81,1962.98 1468.79,1955 1535,1955 1554.04,1974.04 1554.04,2001.32 T1.1 ; C19.1 v1(2568,3245) ; C18.1 v1(2568,3335) ; IC2.2@2580,2644.84 IC2.2 v1@2649.84,2644.84 ; C11.1@2640,2505 2640,2540 2649.84,2549.84 IC2.6 v1@2649.84,2644.84 ; v1@2649.84,2645 v1@2649.84,2644.84 ; IC2.9 v1@2649.84,2644.84
  Top Layer w20: P1.17 4510,1655 4510,2155 ; P1.7 4510,2155 ; P1.1 4510,2355 4510,2155
  Top Layer w30: 1365,2270 1365,2040 1414.53,1990.47 R4.2 ; C13.2 1705,2639.76 ; 1780,2295 1800,2315 C12.2 ; R15.1 1800,2634.76 1805,2639.76 ; v1(2318,3484.68) 2318,3485.47 R38.1@2318,3512.74 ; 2682.56,2654.84 2690,2654.84 ; R42.1 R41.1 R40.1 ; R32.2 v1(3000,3370) ; 3950,3275 3955.47,3280.47 R11.2
  Top Layer w50: v1(1140,2640) 1159.65,2640 1167.33,2632.33 ; 1245,2270 v1(1245,2405) ; v1(1425,3010) 1453.27,3038.27 1525.67,3038.27 IC5.1 ; v1(1670,3290) 1670,3300 C17.1
  Top Layer w70: SW1.0@3472.44,1370.08 3465,1377.52 3465,1460 3515,1510 3908.99,1510 3970,1448.99 SW1.0@3970,1371.75 ; SW1.0@3954.43,1371.75 SW1.0@3970,1371.75 ; P1.17 P1.19 4460,1460 4371.75,1371.75 SW1.0@3970,1371.75
  Top Layer w80: 1072.84,2270 v1(1130,2270) 1170,2270 ; 1072.84,2639.76 1114.18,2639.76 1114.41,2640 v1(1140,2640) ; v1@1159.65,2640 1174.53,2640 1174.76,2639.76 ; 1167.33,2350 1167.33,2272.67 1170,2270 ; 1167.33,2570 1167.33,2632.33 ; 1175,2640 1174.76,2639.76 ; v1@3580,3115.2 3770,3115.2 3865,3115.2 3920,3115.2 3960,3115.2 4170,3115.2 ; R19.1@3590,3435 3590,3355 3670,3275 3900,3275 3950,3275 4190,3275 4230,3315 4230,3275 EXT1.1@4230,3135.39 ; 4175,3115.2 4230,3115.2 4310.2,3115.2 ; 4310.2,3115 4310.2,3115.2 ; v1@4335,2800 4335,3104.9 4324.7,3115.2 4310.2,3115.2 ; P1.7 4415,2105 4330,2020 v1(4080,2020) 3795,2020 3485,1710 1905,1710 1785,1830 1785,2270 1365,2270 1245,2270 1170,2270 ; P1.1 4375,2405 4245,2275 v1(4100,2275) 4075,2275 v1(3810,2275) 3730,2275 3415,1960 2095,1960 2040,2015 2040,2570 1970.24,2639.76 1805,2639.76 1705,2639.76 1174.76,2639.76
  Top Layer w100: v1(1130,2270) 1130,2000 1130,1757.79 1314.96,1572.83 1531.5,1356.3 1600,1356.3 pad.1@1818.9,1356.3 ; RTC1.1@4235,2800 4335,2800 v1(4350,2800) v1(4450,2800) v1(4550,2800) 4605,2800 4702.5,2702.5 4806.96,2598.04 4806.96,2470.6 pad.1@4818.9,2458.66
  Bottom Layer w15: IC3.4@1255,2450.32 IC3.4 1225,2450.32 1225,2425 v1(1245,2405) 1245.97,2405 1270.97,2380 1440,2380 1500.47,2440.47 IC1.6
  Bottom Layer w30: v1(3385,3636.03) 3388.97,3636.03 3575,3450 v1(3590,3450)
  Bottom Layer w50: v2(2293,3336) 2318,3361 v1(2318,3484.68) ; v2(2366,3300) v2@2376,3290 ; v1(2568,3245) 2568,3290 v1(2568,3335)
  Bottom Layer w80: v2(2366,3265) 2418,3213 v1@2418,3115 ; v2@2376,3290 2568,3290 2790,3290 2850,3350 3020,3350 3255,3115 v1@3570,3115 ; v1(3580,3115) 3580,2975 3765,2790 4230.1,2790 4490,2790 4605,2675 4605,2585 4460,2440 P1.1
  Bottom Layer w100: 1140,2664.76 1140,2905 1245,3010 v1(1425,3010) 1425,3045 1645,3265 1645,3387.13 pad.1@1818.9,3561.02 ; pad.1@1314.96,3344.49 1615.51,3344.49 ; v1(2560,2765) 2595,2765 2640,2720 v1(2640,2635) 2745,2530 v1(3330,2510) v1(3330,1970)
  other v1: 1400,1100 1500,1100 1600,1100 1700,1100 1800,1100 1900,1100 2000,1100 2100,1100 2200,1100 2300,1100 2400,1100 2500,1100 2600,1100 2700,1100 2800,1100 2900,1100 3000,1100 3100,1100 3200,1100 3300,1100 4100,1100 4200,1100 4300,1100 4400,1100 4500,1100 4600,1100 4700,1100 4800,1100 1450,1200 1550,1200 1650,1200 1750,1200 1950,1200 2050,1200 2150,1200 2250,1200 2350,1200 2450,1200 2550,1200 2650,1200 2750,1200 2850,1200 2950,1200 3050,1200 3150,1200 3250,1200 3350,1200 4550,1200 4650,1200 4750,1200 4850,1200 1400,1300 1500,1300 1600,1300 2000,1300 2100,1300 2200,1300 2300,1300 2400,1300 2500,1300 2600,1300 2700,1300 2800,1300 2900,1300 3000,1300 3100,1300 3200,1300 3300,1300 3400,1300 4600,1300 4700,1300 4800,1300 1350,1400 1450,1400 1550,1400 1650,1400 2050,1400 2150,1400 2250,1400 2350,1400 2450,1400 2550,1400 2650,1400 2750,1400 2850,1400 2950,1400 3050,1400 3150,1400 3250,1400 3350,1400 4750,1400 4850,1400 1100,1500 1500,1500 1600,1500 1700,1500 2000,1500 2100,1500 2200,1500 2300,1500 2400,1500 2500,1500 2600,1500 2700,1500 2800,1500 2900,1500 3000,1500 3100,1500 3200,1500 3300,1500 3400,1500 4700,1500 4800,1500 1550,1600 1650,1600 3750,1600 3850,1600 4750,1600 4850,1600 1100,1700 1200,1700 1500,1700 4700,1700 4800,1700 1150,1800 1250,1800 1350,1800 1450,1800 4750,1800 4850,1800 1100,1900 1200,1900 1300,1900 1400,1900 1500,1900 4700,1900 4800,1900 1150,2000 1250,2000 1350,2000 4750,2000 4850,2000 3805,2015 1100,2100 1200,2100 1300,2100 4800,2100 1150,2200 1550,2200 3050,2200 3150,2200 3250,2200 4850,2200 3100,2300 3200,2300 3300,2300 4800,2300 3150,2400 3250,2400 3350,2400 3450,2400 4250,2400 2010,2460 2895,2545 4750,2600 4600,2700 4700,2700 4800,2700 1150,2800 4650,2800 4750,2800 4850,2800 1665,2810 2715,2885 1100,2900 1200,2900 4100,2900 4200,2900 4300,2900 4400,2900 4500,2900 4600,2900 4700,2900 4800,2900 1150,3000 3250,3000 3350,3000 4350,3000 4450,3000 4550,3000 4650,3000 4750,3000 4850,3000 1100,3100 1200,3100 1700,3100 3200,3100 3300,3100 4400,3100 4500,3100 4600,3100 4700,3100 4800,3100 2418,3105 1150,3200 1550,3200 1650,3200 2950,3200 3850,3200 3950,3200 4050,3200 4150,3200 4250,3200 4350,3200 4450,3200 4550,3200 4650,3200 4750,3200 4850,3200 1100,3300 3700,3300 3800,3300 3900,3300 4400,3300 4500,3300 4600,3300 4700,3300 4800,3300 1150,3400 3750,3400 3850,3400 4350,3400 4450,3400 4550,3400 4650,3400 4750,3400 4850,3400 1400,3500 4400,3500 4500,3500 4600,3500 4700,3500 4800,3500 1450,3600 4450,3600 4550,3600 4650,3600 4750,3600 4850,3600 1400,3700 4400,3700 4500,3700 4600,3700 4700,3700 4800,3700 1450,3800 4450,3800 4550,3800 4650,3800 4750,3800 4850,3800
  other v2: 2257,3265 2293,3265 2330,3265 2257,3300 2293,3300 2330,3300 2257,3336 2330,3336 2365,3336
GOOD_BAT: IC1.5 R5.1 U2.4 | length 2023.9
  Top Layer w12: R5.1 v1(2355,2165) 2355,2170 2545,2360 2860,2360 3127.8,2627.8 U2.4
  Bottom Layer w15: IC1.5 1540.61,2435.53 1540.61,2429.24 1604.85,2365 2080,2365 2280,2165 v1(2355,2165)
IRQ_SCL: R28.2 U2.14 | length 1638.5
  Top Layer w12: U2.14@3472.2,2653.39 3586.61,2653.39 v1(3630,2610)
  Top Layer w20: v1(4005,1740) R28.2
  Bottom Layer w15: v1(3630,2610) 3665,2575 3980,2575 4005,2550 4005,1950 4020,1935 4020,1870 4005,1855 v1(4005,1740)
IRQ_SDA: R29.1 U2.15 | length 1862.4
  Top Layer w12: U2.15@3472.2,2678.98 3641.02,2678.98 v1(3690,2630)
  Top Layer w20: v1(4050,1580) 4050,1540 4110,1480 R29.1
  Bottom Layer w15: v1(3690,2630) 3715,2605 4005,2605 4035,2575 4035,1960 4050,1945 v1(4050,1580)
NetC11_2: C11.2 IC2.7 | length 107.2
  Top Layer w15: C11.2 2692.56,2506.97 2700.81,2515.22 2700.81,2604.44 IC2.7@2696.48,2604.44
NetC14_1: C14.1 C16.1 IC4.8 IC4.9 IC4.15 R18.2 R19.2 U1.6 | length 660
  Top Layer w30: R19.2@3580,3539.06 3590,3539.06 3591.81,3539.06 R19.2@3602.28,3549.53 ; 3642.44,3555.73 C14.1 ; 3730.73,3555.73 3772.1,3528.62 U1.6
  Top Layer w35: IC4.8@3400.43,3473.27 IC4.15@3400.43,3516.28
  Top Layer w50: C16.1@3342.87,3545 3465,3545 3466.38,3543.62 IC4.15@3470.94,3539.06 ; IC4.15@3475.43,3534.57 3472.87,3537.13 IC4.15@3470.94,3539.06 ; R19.2@3591.81,3539.06 3625.77,3539.06 3642.44,3555.73 3695,3555.73 3730.73,3555.73 ; 3640,3539.06 3590,3539.06 IC4.15@3470.94,3539.06
NetC15_2: C15.2 R16.2 U1.3 | length 481.6
  Top Layer w15: U1.3 3930.51,3474.49 3975,3430 v1(3985,3430)
  Top Layer w30: R16.2 C15.2
  Bottom Layer w20: v1(3900,3630) 3900,3450 3920,3430 v1(3985,3430)
NetC16_2: C16.2 IC4.11 | length 271.1
  Top Layer w8: C16.2 3335,3400 3360,3375 3390,3375 3445,3430 IC4.11 IC4.11@3445,3475.51
NetC18_2: C18.2 IC6.12 | length 83.7
  Top Layer w12: IC6.12 2456.07,3310.63 2468.72,3323.28 2470.69,3323.28 2480.44,3333.03 C18.2
NetC19_2: C19.2 IC6.10 | length 84.5
  Top Layer w12: IC6.10 2454.18,3271.26 2468.72,3256.72 2470.69,3256.72 2480.44,3246.97 C19.2
NetD1_3: D1.3 IC1.10 | length 1328.1
  Top Layer w20: v1(2565,2265) 2568.71,2268.71 2582.4,2268.71 2583.7,2270 2650,2270 2662.2,2282.2 2662.2,2307.48 D1.3
  Bottom Layer w15: IC1.10 1540,2520 1595,2575 2030,2575 2336.29,2268.71 v1@2568.71,2268.71
NetIC2_1: IC2.1 L1.1 | length 387.6
  Top Layer w12: v3(2550,2679.53) 2550,2679.06 2535.47,2664.53 IC2.1
  Top Layer w30: v3(2465,2690) v3(2465,2800)
  Bottom Layer w30: v3(2465,2800) v3(2465,2690) 2470.41,2690 2480.88,2679.53 v3(2550,2679.53)
NetIC2_3: IC2.3 L1.2 | length 350.2
  Top Layer w12: v3(2535,2605) 2550,2605 2551.09,2606.09 2551.09,2611.09 2565.16,2625.16 IC2.3
  Top Layer w30: v3(2465,2485) v3(2465,2585)
  Bottom Layer w30: v3(2465,2485) v3(2465,2585) 2465,2590 2480,2605 v3(2535,2605)
NetIC2_8: IC2.8 R17.1 | length 255.2
  Top Layer w15: R17.1@2694.53,2420 2715,2420 2735,2440 2735,2610 2719.56,2625.44 2705,2625.44
NetIC5_3: IC5.3 R13.2 R20.2 | length 287.4
  Top Layer w50: R20.2@1305,2935 1305,2883.43 1323.98,2864.45 IC5.3
NetIC6_5: IC6.5 IC6.6 R37.2 | length 111.5
  Top Layer w30: R37.2@2331,3115 2331,3226.5
NetIC6_7: IC6.7 R25.2 | length 908.4
  Top Layer w12: IC6.7 2360.76,3184.24 2400,3145 2485,3145 2530,3100 v1(2605,3100) ; v1(2775,3100) 2775,3215 2845,3285 R25.2@3050.47,3285
  Bottom Layer w12: v1(2605,3100) v1(2775,3100)
NetIC6_8: IC6.8 R26.2 | length 199.9
  Top Layer w12: IC6.8 2380.44,3213.38 2418.82,3175 2525.47,3175 R26.2
NetIC6_14: IC6.14 R34.1 | length 140.4
  Top Layer w12: IC6.14 2418.64,3350 2418.64,3383.64 2470,3435 2470,3446.53 R34.1@2478.47,3455
NetIC6_17: IC6.17 Q2.4 | length 410.1
  Top Layer w12: Q2.4 2293.63,3653.9 2383,3564.53 2383,3465 2341.07,3423.07 IC6.17
NetIC6_18: IC6.18 R38.2 | length 229.1
  Top Layer w12: R38.2@2315.26,3561.79 2335.74,3561.79 2358,3539.53 2358,3475 2321.39,3438.39 IC6.18
NetIC6_19: IC6.19 IC6.20 Q2.1 Q2.2 Q2.3 | length 273
  Top Layer w30: Q2.3@2223,3620 2223,3495 2292,3426 2292,3375.57
NetIC6_26: IC6.26 IC6.27 L2.1 | length 270
  Top Layer w30: L2.1 2046.9,3224.57 2087.57,3224.57 2143,3280 2217.71,3280
NetP1_10: P1.10 SW1.1 | length 1423.2
  Bottom Layer w20: SW1.1 3660.83,1525 4285,1525 4325,1565 4325,1860 4420,1955 4515,1955 4560,2000 P1.10
NetP1_12: P1.12 SW1.2 | length 1218.5
  Bottom Layer w20: SW1.2 3783.31,1490 4345,1490 4360,1505 4360,1795 4420,1855 4510,1855 P1.12
NetP1_14: P1.14 SW1.3 | length 1020.2
  Bottom Layer w20: SW1.3 SW1.3@3881.32,1430.53 ; SW1.3@3881.32,1440 SW1.3@3881.32,1430.53 ; P1.14 4560,1795 4520,1755 4425,1755 4395,1725 4395,1460 4375,1440 3890.79,1440 SW1.3@3881.32,1430.53
NetP1_16: P1.16 SW1.6 | length 986.4
  Bottom Layer w20: SW1.6 3879.13,1320.87 3900,1300 4360,1300 4510,1450 4510,1655 P1.16
NetP1_18: P1.18 SW1.5 | length 1196.5
  Top Layer w20: SW1.5 3783.46,1250 4405,1250 4620,1465 4620,1555 4575,1600 4565,1600 P1.18
NetP1_20: P1.20 SW1.4 | length 1198.4
  Bottom Layer w20: SW1.4 3625.98,1250 4405,1250 4560,1405 P1.20
NetQ1_4: Q1.4 R30.2 T2.3 | length 361.9
  Top Layer w20: Q1.4@2650,3495 Q1.4 2680,3495 2725,3450 2815,3450 2845,3420 2845,3395.59 T2.3@2832.03,3395.59
  Top Layer w30: R30.2 2580.47,3495 Q1.4@2650,3495
NetQ1_5: Q1.5 Q1.6 Q1.7 Q1.8 Q1.9 Q1.10 | length 290
  Top Layer w50: 2740,3570 2880.04,3570 ; Q1.5@2880.04,3495 2880.04,3570 ; Q1.8@2880.04,3645 2880.04,3570
NetQ3_2: Q3.2 R35.2 T3.6 | length 285.2
  Top Layer w15: T3.6 3283.65,3398.65 3300.59,3415.59 3300.59,3529.41 3285,3545
  Top Layer w30: Q3.2 3285,3545
NetQ3_5: Q3.5 Q3.6 Q3.7 Q3.8 Q3.9 Q3.10 | length 290.2
  Top Layer w50: Q3.8 Q3.7 2959.84,3570 ; Q3.5 Q3.6 2959.84,3570 ; 3100,3570 2959.84,3570
NetR1_2: R1.2 R4.1 T1.5 T1.6 | length 206.7
  Top Layer w30: R4.1 R1.2 1460.47,2125 1500,2125 1536.32,2088.68 T1.6@1554.04,2088.68 ; T1.6 T1.6@1554.04,2088.68 ; T1.5@1575,2088.68 T1.6@1554.04,2088.68
NetR2_1: R2.1 R3.1 T1.2 | length 161.9
  Top Layer w15: T1.2 1580,1840.47 R3.1@1580.47,1840
NetR9_2: R9.2 T1.4 | length 519.3
  Top Layer w15: T1.4 1605.59,2120.59 1630,2145 v1(1635,2145)
  Top Layer w20: v1(1530,2350) 1685.59,2350 1701.06,2365.47 R9.2
  Bottom Layer w15: v1(1530,2350) 1560,2350 1635,2275 v1(1635,2145)
NetR18_1: R18.1 U1.5 | length 95.6
  Top Layer w15: R18.1 3695.47,3490 3735,3490 3743.11,3498.11 U1.5
NetR31_1: R31.1 R40.2 U2.3 | length 335.7
  Top Layer w12: R40.2 3079.53,2624.53 3108.39,2653.39 U2.3
  Top Layer w30: R40.2 R31.1
NetR32_1: R32.1 T2.1 T2.5 | length 181.7
  Top Layer w15: T2.5 2745.79,3370 2770,3370 2795.59,3344.41 2831.65,3344.41 T2.1 2879.51,3344.04 R32.1
NetR33_1: R33.1 R41.2 U2.2 | length 441.9
  Top Layer w12: v1(3135,2700) 3165,2700 3186.02,2678.98 U2.2
  Top Layer w30: R41.2 R33.1
  Bottom Layer w12: v1(2895,2665) 3075,2665 3110,2700 v1(3135,2700)
NetR36_1: R36.1 T3.2 T3.4 | length 494.4
  Top Layer w15: T3.2 3107.59,3373.06 R36.1 3075,3340.47 3075,3260 3095,3240 3210,3240 3285,3315 T3.4@3285,3345 ; T3.4@3254.04,3347.1 3267.93,3347.1 T3.4
NetR39_1: R39.1 R42.2 U2.1 | length 579.2
  Top Layer w12: v1(3140,2765) 3167.23,2765 3227.66,2704.57 U2.1
  Top Layer w30: R42.2 v1(2800,2667.5) R39.1
  Bottom Layer w12: v1(2800,2667.5) 2837.5,2705 3005,2705 3065,2765 v1(3140,2765)
PWR_IRQ: P1.15 U2.13 | length 2284.6
  Top Layer w12: U2.13@3472.2,2627.8 3547.2,2627.8 v1(3630,2545)
  Top Layer w20: v1(3985,1580) 3985,1530 4085,1430 4330,1430 4360,1460 4360,1605 P1.15
  Bottom Layer w15: v1(3630,2545) 3955,2545 3975,2525 3975,1940 3990,1925 3990,1885 3960,1855 3960,1675 3985,1650 v1(3985,1580)
PWR_SCL: P1.11 R22.1 R24.1 R28.1 | length 320.5
  Top Layer w20: R28.1 R24.1 R22.1 4304.53,1905 P1.11
PWR_SDA: P1.13 R23.2 R27.2 R29.2 | length 390.2
  Top Layer w20: R29.2@4302.5,1480 4302.5,1640 4302.5,1647.5 P1.13
SW_OPEN: IC1.1 R6.1 U2.5 | length 2083.7
  Top Layer w12: v1(2795,2250) 3147.2,2602.2 U2.5
  Top Layer w30: R6.1 v1(2535,2170)
  Bottom Layer w15: IC1.1 1566.26,2500 1580,2500 1625,2545 2010,2545 2315,2240 2490,2240 2535,2195 v1(2535,2170) 2755,2170 2795,2210 v1(2795,2250)
USB_CON_N: IC3.1 J1.2 R10.1 | length 216.9
  Top Layer w15: J1.2 1299.72,2484.25 1320.26,2504.78 1324.19,2504.78 1330.47,2511.06 R10.1
  Bottom Layer w15: IC3.1 1299.68,2489.68 1305.34,2495.34 1305.34,2510.34 v1(1310,2515)
USB_CON_P: IC3.3 J1.3 R14.1 | length 218.1
  Top Layer w15: J1.3 1296.81,2458.66 1320.26,2435.22 1324.19,2435.22 1330.47,2428.94 R14.1
  Bottom Layer w15: IC3.3 1299.68,2450.32 1305.34,2444.66 1305.34,2429.66 v1(1310,2425)
USB_DEV_N: C13.1 IC1.2 P1.3 R15.2 | length 3615.3
  Top Layer w20: v1(1645,2500) 1657.44,2512.44 C13.1 1798.03,2512.44 R15.2 1867.2,2443.27 1935,2374.62 1935,1945 2020,1860 3430,1860 3745,2175 4270,2175 4400,2305 P1.3
  Bottom Layer w8: IC1.2 1566.63,2479 1624.63,2479 1645,2499.37 v1(1645,2500)
USB_DEV_P: C12.1 IC1.3 P1.5 R9.1 | length 3586.2
  Top Layer w20: v1(1645,2440) 1660.47,2424.53 R9.1 1798.03,2424.53 C12.1 C12.1@1812.66,2422.56 ; C12.1@1812.36,2422.86 C12.1@1812.66,2422.56 ; P1.5 4370.71,2205 4290.71,2125 4290,2125 4285,2120 3765,2120 3455,1810 1985,1810 1885,1910 1885,2349.31 C12.1@1812.66,2422.56
  Bottom Layer w8: IC1.3 1566.63,2461 1624.63,2461 1645,2440.63 v1(1645,2440)
USB_PU: P1.9 R3.2 | length 3083.2
  Top Layer w20: R3.2 1710.47,1645 3610,1645 3920,1955 4410,1955 P1.9
USB_R_N: IC1.8 R10.2 | length 108.8
  Bottom Layer w12: v1(1420,2515) 1455.16,2479.84 IC1.8
USB_R_P: IC1.7 R14.2 | length 108.8
  Bottom Layer w12: v1(1420,2425) 1455.16,2460.16 IC1.7
USBGT: IC6.9 Q1.2 R30.1 | length 858.2
  Top Layer w12: IC6.9@2408.18,3251.76 2438,3251.76 2438,3215 2450,3203 2603,3203 2635,3235 2635,3400 2595,3440 2535,3440 2515,3460 2515,3555 2534.53,3574.53 R30.1
  Top Layer w30: R30.1 2580.47,3595 Q1.2 Q1.2@2670,3595
VBAT: BAT1.1 IC6.16 Q2.5 Q2.6 Q2.7 Q2.8 Q2.9 R12.1 | length 3701.3
  Top Layer w12: Q2.9@2163,3655 2163,3670 2178,3685 2302.53,3685 2408,3579.53 2408,3455 2360.85,3407.85 2360.85,3377.65 IC6.16
  Top Layer w50: 2058.53,3741.47 2075,3725 ; v1@2085,3592.26 2085,3614.92 2085,3637.26 Q2.5@2085,3655
  Top Layer w100: 1575,3590 1575,3725 1645,3795 2145,3795 ; v1@2075,3592.26 2075,3637.26 2075,3725 2145,3795 ; BAT1.1@4230,3715 4150,3795 2145,3795
  other v1: 2075.26,3592.26 2075.26,3637.26
VBUS: C4.2 C5.2 C6.2 IC1.9 IC3.6 J1.1 Q1.3 R1.1 R13.1 R26.1 T2.2 T2.4 T2.6 | length 3801.2
  Top Layer w15: J1.1 1224.84,2509.84 v1(1245,2530) ; 2680,3340 2684.04,3344.04 ; 2683.75,3414.53 2684.04,3415.96 2704.41,3395.59 2745.04,3395.59 T2.4 2745.63,3395 2780,3395 2805,3370 2831.65,3370 T2.2 ; 2684.41,3344.41 2684.04,3344.04 ; T2.6 2684.04,3344.04
  Top Layer w30: R26.1 2680,3155 2690,3155 2680,3145
  Top Layer w50: v1(1245,2725) C6.2@1305,2725 ; R13.1 C6.2@1305,2725 ; v1(2615,3545) Q1.3 ; v1(2660,3440) 2680,3420 2680,3340 2680,3155 2680,3145 2680,3071.18 2558.82,2950 2010,2950 1785,2725 C6.2@1305,2725
  Bottom Layer w12: v1(1245,2530) 1245.71,2530 1275.71,2560 1435,2560 1495.47,2499.53 IC1.9
  Bottom Layer w15: v1(1245,2530) 1225.32,2510.32 1225.32,2489.68 IC3.6 IC3.6@1255,2489.68
  Bottom Layer w50: v1(1245,2725) v1(1245,2530) 1194.29,2530 1165,2500.71 1165,2340 1240,2265 1395,2265 v1(1460,2200) ; v1(2615,3545) 2615,3485 v1(2660,3440)
VDC: C1.2 C2.2 C3.2 EXT1.2 Q3.1 R25.1 T3.1 T3.3 T3.5 | length 2362.8
  Top Layer w20: R25.1 3104.53,3293.06 3155.87,3344.41 3218.94,3344.41 ; 3158.94,3347.47 T3.3 3213.28,3347.47 3225,3359.19 3225,3373.06 ; Q3.1 3172.99,3492.99 3152.99,3492.99 3140,3480 3140,3415 3156.35,3398.65 T3.1 3213.28,3398.65 3225,3386.94 3225,3373.06 ; T3.5 3225,3373.06
  Top Layer w70: 3720,3015 3770,3015 3865,3015 3960,3015 4115,3015 4130,3000 EXT1.2@4229.9,3000
  Bottom Layer w70: 3725,3020 3730,3015 3770,3015 3865,3015 3960,3015 4110,3015 4125,3000 EXT1.2@4229.9,3000
  Bottom Layer w80: 3210,3470 3210,3320 3315,3215 3625,3215 3725,3115 3725,3020
  other v1: 3770,3020 3865,3020 3960,3020 3210,3490
VIN: IC6.23 IC6.24 IC6.25 Q1.1 Q3.3 | length 1441.4
  Top Layer w30: v1(2188,3350) 2195.4,3350 IC6.24@2213.35,3332.05 ; 2213,3320 2213.35,3320.35 IC6.24@2213.35,3332.05 ; IC6.24 IC6.24@2213.35,3332.05 ; IC6.23 2213.35,3348.27 IC6.24@2213.35,3332.05 ; Q3.3 v1(3220,3595)